# Altium PCB Drude02.PcbDoc (part 3 of 3)
Units mil, origin at the board's own origin, x right, y up, seen from the top; angles counter-clockwise.
Board outline 1961.13 x 2874.02 mil, 4 copper layers (Top Layer, GND, Supply, Bottom Layer), stack 59.85 mil thick; 217 components, 145 nets, 718 pads, 491 vias.
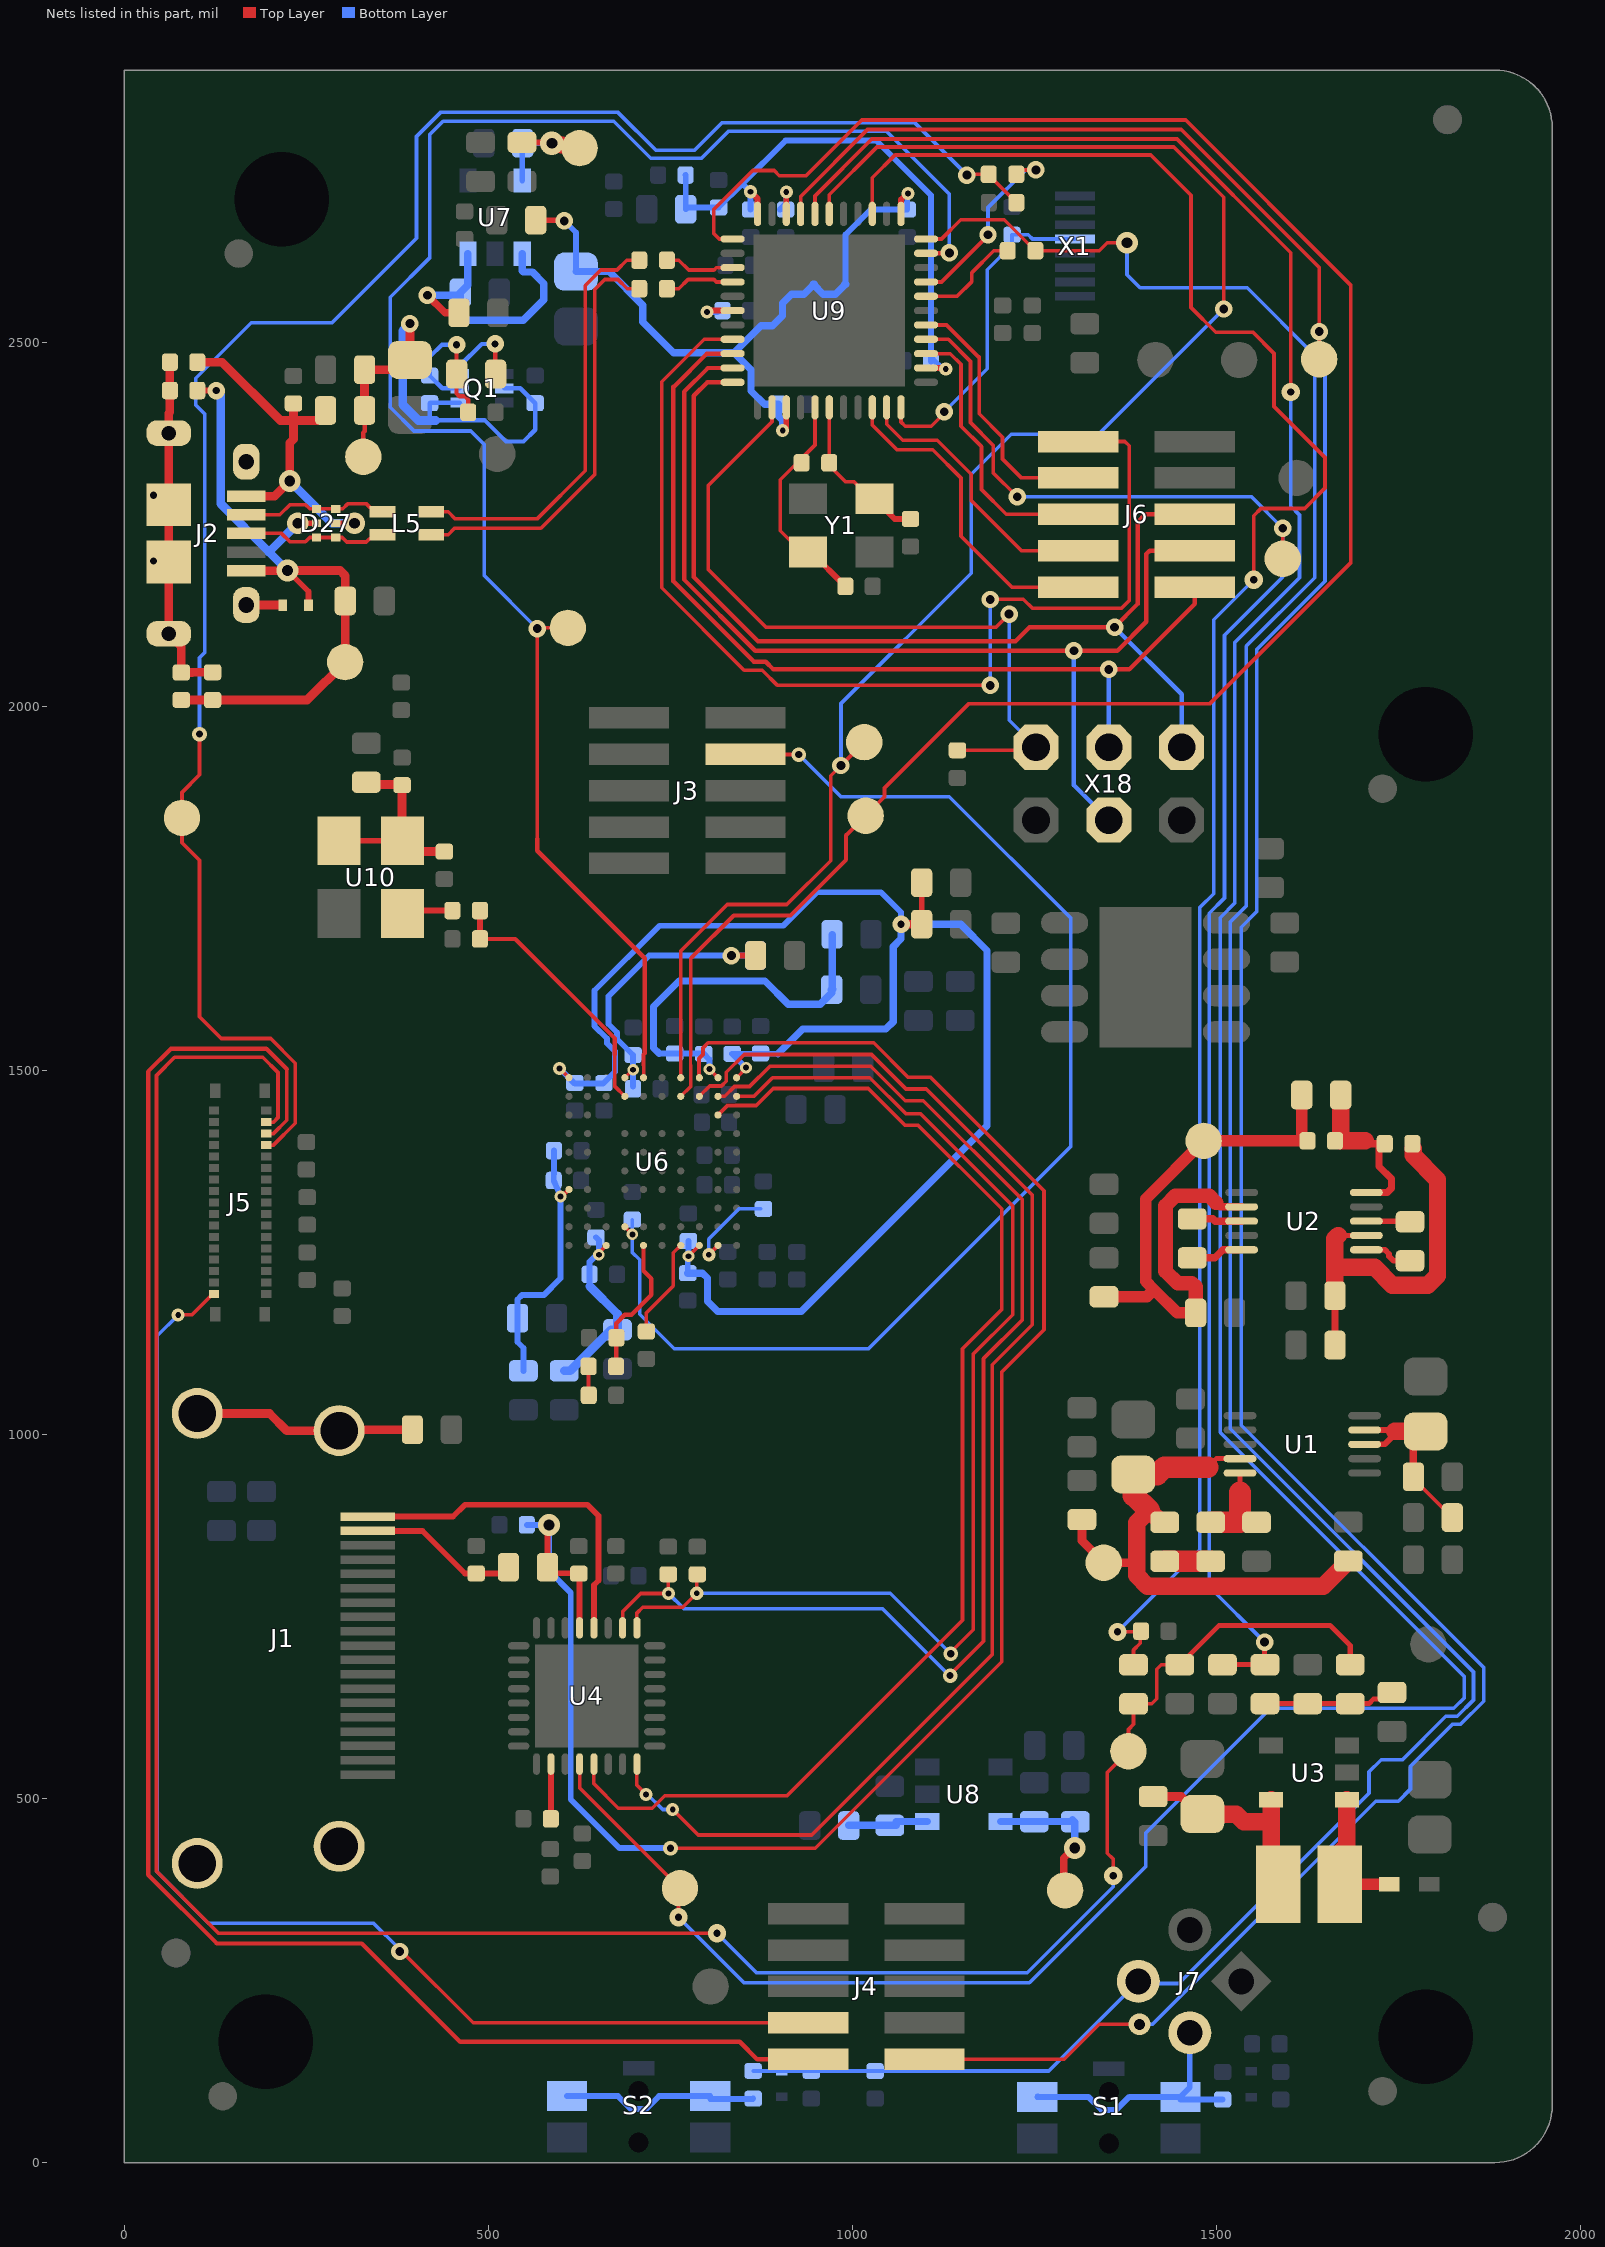
[diagram p5: the nets of this part, all layers, seen from the top]

## Via types
v1: diameter 20, hole 10, Top Layer to Bottom Layer, 120 vias
v2: diameter 16, hole 8, Top Layer to Bottom Layer, tented both sides, 85 vias
v3: diameter 24, hole 12, Top Layer to Bottom Layer, tented both sides, 58 vias
v4: diameter 30, hole 15, Top Layer to Bottom Layer, tented both sides, 34 vias
v5: diameter 19.68, hole 8, Top Layer to Bottom Layer, 34 vias
v6: diameter 18, hole 8, Top Layer to Bottom Layer, tented both sides, 31 vias
v7: diameter 29, hole 15, Top Layer to Bottom Layer, tented both sides, 26 vias
v8: diameter 24, hole 10, Top Layer to Bottom Layer, tented both sides, 20 vias
v9: diameter 30, hole 15, Top Layer to Bottom Layer, 17 vias
v10: diameter 20, hole 10, Top Layer to Bottom Layer, tented both sides, 13 vias
v11: diameter 26, hole 11.81, Top Layer to Bottom Layer, 12 vias
v12: diameter 16, hole 8, Top Layer to Bottom Layer, 9 vias
v13: diameter 25, hole 10, Top Layer to Bottom Layer, 9 vias
v14: diameter 26, hole 12, Top Layer to Bottom Layer, tented both sides, 5 vias
v15: diameter 24, hole 12, Top Layer to Bottom Layer, 5 vias
v16: diameter 20, hole 8, Top Layer to Bottom Layer, tented both sides, 4 vias
v17: diameter 36, hole 20, Top Layer to Bottom Layer, tented both sides, 4 vias
v18: diameter 40, hole 24, Top Layer to Bottom Layer, tented both sides, 2 vias
v19: diameter 27, hole 12, Top Layer to Bottom Layer, tented both sides, 1 vias
v20: diameter 32, hole 15, Top Layer to Bottom Layer, tented both sides, 1 vias
v21: diameter 20, hole 8, Top Layer to Bottom Layer, 1 vias

## Nets (pads, with @x,y where several pads share a name; then routed paths per layer and width w, separated by ;. In a path a pad name is that pad's centre, name@x,y a point inside that pad or via, vN(x,y) a via of type N, cw(c..) or ccw(c..) an arc to the next point about the centre after c; other vN are vias at no path point) (continued)
NetC5_1: C5.1 FL2.2 R7.1 U2.7 | length 536.9
  Top Layer w7: 1667.37,1273.44 U2.7@1705.76,1273.44
  Top Layer w10: FL2.2@1662.65,1123 C5.1@1662.65,1190.76
  Top Layer w24: C5.1@1662.65,1190.76 1662.65,1234.07 ; 1667.37,1273.44 1662.65,1268.72 1662.65,1234.07 ; R7.1@1770.05,1392.65 1770.05,1383.51 1803.48,1350.07 1803.48,1220.19 1802.91,1219.61 1802.91,1218.2 1789.94,1205.23 1741.65,1205.23 1717.05,1229.83 1666.88,1229.83 1662.65,1234.07
NetC6_1: C6.1 U2.3 | length 69.2
  Top Layer w10: C6.1@1466.58,1296.28 1494.93,1296.28 1498.08,1293.13 U2.3@1534.5,1293.13
NetC6_2: C6.2 U2.5 | length 72.5
  Top Layer w10: C6.2@1466.58,1242.73 1497.83,1242.73 1508.86,1253.76 U2.5@1534.5,1253.76
NetC7_1: C7.1 U2.8 | length 60.4
  Top Layer w8: U2.8@1705.76,1293.13 1765.01,1293.13 C7.1@1765.8,1292.34
NetC7_2: C7.2 U2.6 | length 68.1
  Top Layer w8: U2.6@1705.76,1253.76 1731.39,1253.76 1737,1248.15 1737,1244.91 1743.11,1238.8 C7.2@1765.8,1238.8
NetC8_1: C8.1 C12.2 FL5.1 R8.1 TP5.TP U2.2 | length 875.2
  Top Layer w10: 1499.27,1318.47 1504.93,1312.81 U2.2@1534.5,1312.81
  Top Layer w16: FL5.1@1345.47,1189.23 1404.39,1189.23 1414.11,1198.94 ; C8.1@1471.31,1167.14 1445.91,1167.14 1414.11,1198.94 ; C12.2@1616.98,1466.35 1616.98,1426.05 1616.98,1403.37 TP5.TP@1482.33,1403.37 1402.61,1323.64 1402.61,1210.45 1414.11,1198.94
  Top Layer w20: C8.1@1471.31,1167.14 1471.31,1202.8 1466.11,1208 1446.43,1208 1429.9,1224.54 1429.9,1314.47 1443.27,1327.84 1489.9,1327.84 1499.27,1318.47
NetC10_1: C10.1 FL4.1 R1.2 R2.1 TP4.TP U1.9 | length 767.4
  Top Layer w7: 1487.94,955.1 1499.75,966.91 U1.9@1532.23,966.91
  Top Layer w12: FL4.1@1315.11,883.23 1315.11,854 TP4.TP@1345.11,824 1390.2,824
  Top Layer w24: R2.1@1428.89,879.51 1423.77,879.51 1407.23,896.05 1390.2,879.02 1390.2,824 1390.2,806.94 1405.18,791.97 1646.85,791.97 R1.2@1681.11,826.23
  Top Layer w30: 1407.23,896.05 1387.02,916.26 1385.57,916.26 C10.1@1385.57,945.26 1418.57,945.26 1428.42,955.1 1487.94,955.1
NetC11_1: C11.1 FL15.2 L1.1 U3.5 | length 235.1
  Top Layer w12: FL15.2@1413,502.77 1451.54,502.77 1475.54,478.76 C11.1@1480.62,478.76
  Top Layer w24: C11.1@1493,478.6 1527.19,478.6 1537.62,468.17 1574.83,468.17 ; L1.1@1574.83,426.88 1574.83,468.17 ; U3.5@1574.83,498.28 1574.83,468.17
NetC12_1: C12.1 R7.2 R8.2 U2.10 | length 230.1
  Top Layer w10: 1704.45,1403.37 1708.39,1399.43 R7.2@1731.05,1399.43 ; U2.10@1705.76,1332.5 1734.3,1332.5 1740.2,1338.4 1740.2,1351.2 1723.27,1368.13 R7.2@1723.27,1399.42
  Top Layer w24: C12.1@1670.52,1466.35 1670.52,1426.05 1670.52,1403.37 1704.45,1403.37
NetC18_1: C18.1 FL6.2 U7.1 U7.3 | length 404.4
  Top Layer w10: v3(416.11,2565) 440.35,2540.76 FL6.2@459.34,2540.76
  Bottom Layer w10: v3(416.11,2565) 458.02,2565 C18.1@461.34,2568.32 ; U7.3@471.71,2622.12 471.71,2578.69 C18.1@461.34,2568.32 ; U7.1@546.51,2622.12 546.51,2598.24 547.8,2596.95 559.96,2596.95 575.78,2581.14 575.78,2558.77 547.59,2530.58 461.34,2530.58 C18.1@461.34,2568.32
NetC19_1: C19.1 FL7.1 TP6.TP U7.5 | length 171.3
  Top Layer w8: FL7.1@546.11,2774.77 v20@585.94,2774.77
  Top Layer w12: v20@585.94,2774.77 587.18,2774.52 v20(587.02,2773.69)
  Top Layer w24: v20(587.02,2773.69) TP6.TP@625.11,2767
  Bottom Layer w8: U7.5@546.51,2722.51 C19.1@546.51,2773.2 ; C19.1@547.01,2773.69 v20(587.02,2773.69)
NetC20_1: C20.1 FL8.2 U8.1 | length 107.9
  Bottom Layer w10: FL8.2@994.88,463.34 C20.1@1051.32,463.34 C20.1@1059.98,463.34 ; C20.1@1059.98,468.6 U8.1@1102.8,468.6
NetC21_1: C21.1 FL9.1 TP7.TP U8.5 | length 216.4
  Top Layer w10: TP7.TP@1290,381 1290,418.46 1294.77,423.23 1305.23,423.23 1296.23,432.23 v9(1305.23,432.23)
  Bottom Layer w10: U8.5@1203.2,468.6 1299.83,468.6 1302.23,471 1305.23,468 v9(1305.23,432.23)
NetC22_1: C22.1 U4.26 | length 75.2
  Top Layer w8: C22.1@585.62,472.33 585.79,472.5 U4.26@585.79,547.5
NetC23_1: C23.1 C70.2 FL22.1 U4.13 U6.K3 | length 2597.5
  Top Layer w5: v10(750,432) 949,432 1205.11,688.11 1205.11,1086 1263,1143.89 1263,1335 1107.17,1490.83 1076.17,1490.83 1029,1538 801.67,1538 794.67,1531 794.67,1522 789.17,1516.5 789.17,1498 ; U6.K3@789.65,1490.16 789.17,1498 ; 789.17,1498 789.15,1498.35 789.17,1498
  Top Layer w8: v4(583,876) 580.9,873.9 FL22.1@580.9,817.8 589.16,809.54 C70.2@625.13,809.54 ; U4.13@625.16,734.5 C70.2@625.16,809.5
  Bottom Layer w8: C23.1@552.7,876 v4(583,876) 583,813 613.11,782.89 613.11,498.89 680,432 v10(750,432)
NetC24_2: C24.2 FL22.2 J1.18 | length 220.8
  Top Layer w8: J1.18@334.25,867.64 409.47,867.64 467.87,809.24 C24.2@483.13,809.24 518.79,809.24 FL22.2@527.35,817.8
NetC32_1: C32.1 U9.6 | length 49.8
  Top Layer w8: v6(800.11,2541.76) 802.11,2543.76 U9.6@835.24,2543.76
  Bottom Layer w8: v6(800.11,2541.76) 803.41,2541.76 v6@804.41,2540.76 ; v6@805.41,2541.76 C32.1@814.57,2541.76
NetC45_1: C45.1 FL3.1 R4.1 U1.3 U1.4 | length 284.1
  Top Layer w5: FL3.1@1770.34,942 1770.34,939.54 R4.1@1823.88,886
  Top Layer w8: U1.3@1703.49,986.6 1731.17,986.6 1742.78,998.21 1742.78,1006.28 ; U1.4@1703.49,1006.28 1742.78,1006.28 ; 1744.75,1004.31 1742.78,1006.28
  Top Layer w10: FL3.1@1770.34,942 1770.34,987.5 C45.1@1787.15,1004.31
  Top Layer w24: 1744.75,1004.31 C45.1@1787.15,1004.31
NetC46_1: C46.1 C47.2 FL24.1 U10.1 U10.4 | length 271.1
  Top Layer w8: U10.1@294.99,1815.74 380.99,1815.74 U10.4@381.3,1816.05
  Top Layer w12: FL24.1@332.3,1895.97 FL24.1@336.23,1892.04 ; FL24.1@343.6,1892.74 381.3,1892.74 C46.1@381.3,1892.04 ; C46.1@381.6,1891.74 C46.1@381.3,1892.04 ; C47.2@439.3,1800.74 396.61,1800.74 U10.4@381.61,1815.74 381.3,1816.05 C46.1@381.3,1892.04
NetC49_1: C49.1 U6.A4 | length 137.9
  Top Layer w5: C49.1@716.93,1141.7 C49.1@716.93,1141.77 ; C49.1@717,1141.7 C49.1@716.93,1141.77 ; U6.A4@764.06,1259.84 753.78,1249.57 753.78,1231.61 753.96,1231.42 753.96,1204.19 716.93,1167.15 C49.1@716.93,1141.77
NetC50_1: C50.1 R18.2 | length 39.7
  Top Layer w5: R18.2@637.44,1093.6 637.44,1054.29 C50.1@637.73,1054
NetC51_1: C51.1 R18.1 U6.A6 | length 197.2
  Top Layer w5: 712.87,1225 U6.A6@712.87,1259.84
  Top Layer w6: R18.1@676.32,1092.61 675.7,1093.24 C51.1@675.7,1133 675.7,1153 687.29,1164.59 696.37,1164.59 723.78,1192 723.78,1214.09 712.87,1225
NetC55_1: C55.1 U9.42 | length 58.2
  Top Layer w8: U9.42@909.06,2676.63 909.06,2706.7 v6(909.11,2706.76)
  Bottom Layer w8: C55.1@900.11,2682.45 909.11,2691.45 v6(909.11,2706.76)
NetC56_1: C56.1 C59.1 C60.1 C83.1 FL19.1 U9.24 U9.44 | length 812.6
  Top Layer w8: v6(860,2707) 869.68,2697.32 U9.44@869.68,2676.63 ; U9.24@1100.98,2465.02 1127.85,2465.02 1128.11,2464.76 v6(1128.11,2463.76)
  Bottom Layer w8: C83.1@770.81,2730 770.88,2729.93 FL19.1@770.88,2683 773.2,2685.32 C60.1@816,2685.32 848.7,2718.02 ; C59.1@860.11,2682.46 860.11,2706.89 v6(860,2707) 848.98,2718.02 848.7,2718.02 ; v6(1128.11,2463.76) 1123.48,2463.76 1110.64,2476.59 1107.81,2473.76 C56.1@1107.81,2474.76 1107.81,2702.3 1032.61,2777.5 908.18,2777.5 848.7,2718.02
NetC57_1: C57.1 R72.1 U9.17 Y1.1 | length 222.9
  Top Layer w5: R72.1@965.32,2333.88 990.47,2308.74 1002.01,2308.74 Y1.1@1025.14,2285.62 ; R72.1@968.11,2334.88 U9.17@968.11,2410.88
  Top Layer w8: R72.1@965.32,2333.88 R72.1@965.32,2334.88 ; Y1.1@1025.14,2285.62 Y1.1@1030.14,2285.62 1058.08,2257.68 C57.1@1079.65,2257.68
NetC58_1: C58.1 R72.2 U9.16 Y1.3 | length 310.1
  Top Layer w5: Y1.3@943.04,2212.2 Y1.3@938.86,2212.2 929.91,2212.2 900.86,2241.25 900.86,2311.59 948.43,2359.15 U9.16@948.43,2410.88
  Top Layer w8: Y1.3@943.04,2212.2 C58.1@990.08,2165.16
NetC72_1: C72.1 R10.2 R32.2 R34.2 | length 180.7
  Top Layer w7: R34.2@1566.62,630.39 C72.1@1625.12,630.39 R32.2@1683.62,630.39 1709.39,630.39 1716,637 1732.22,637 R10.2@1741,645.77
NetC77_1: C77.1 R30.1 U9.36 | length 2836.1
  Top Layer w5: U9.36@1027.17,2676.63 1027.17,2726.17 1058.51,2757.51 1409.6,2757.51 1465,2702.11 1465,2548 1499,2514 1550,2514 1579,2485 1579,2412 1649,2342 1649,2300 1621,2272 1561,2272 1551,2262 v13(1551,2174) ; v13(1364,729) 1395.3,729 1395.3,713.28 1386,703.99 R30.1@1386,683.77
  Bottom Layer w5: v13(1364,729) 1477,842 1477,1724 1496,1743 1496,2119 v13(1551,2174)
NetC81_2: C81.2 Q1.5 R6.1 R35.2 | length 222.6
  Top Layer w6: v8(456.11,2497) 456.11,2430 460,2426.11 468,2426.11 472.11,2422 C81.2@472.11,2404
  Bottom Layer w6: v8(456.11,2497) 436.11,2497 419.11,2480 R6.1@419.11,2454.54 436.65,2437 Q1.5@460.6,2437
NetC91_1: C91.1 C93.2 D27.5 FL20.2 J2.1 | length 538.2
  Top Layer w8.1: D27.5@290.27,2251.76 313,2251.76 313,2250.76 v7@316,2250.76
  Top Layer w12: C93.2@100.11,2473 134.11,2473 214.11,2393 232.11,2393 ; J2.1@167.3,2288.94 206.18,2288.94 v4(227,2309.76) 227,2361.89 232.11,2367 232.11,2393 ; C91.1@232.11,2416.3 232.11,2393 ; FL20.2@276.34,2406.65 276.34,2395.62 273.72,2393 232.11,2393
  Bottom Layer w12: v4(227,2309.76) 285,2251.76 v7(316,2251.76)
NetD1_A: D1.A L1.2 U3.1 | length 188.1
  Top Layer w16: L1.2@1669.32,382.14 D1.A@1737.24,382.14
  Top Layer w24: L1.2@1669.32,382.14 1669.32,425.4 1679.17,435.24 U3.1@1679.17,498.28
NetFL23_2: FL23.2 J1.20 J1.21 J1.22 J1.23 | length 305.8
  Top Layer w12: J1.22@100,1029.06 199.17,1029.06 222.8,1005.43 J1.20@294.88,1005.43 296.23,1006.78 FL23.2@395.46,1006.78
NetJ1_19: J1.19 U4.12 | length 486.5
  Top Layer w8: J1.19@334.25,887.32 451.43,887.32 467.82,903.71 635.9,903.71 651.13,888.48 651.13,799.56 644.84,793.27 U4.12@644.84,734.5
NetJ4_7: J4.7 J5.1 | length 1819.5
  Top Layer w5: v6(73.82,1164.37) 92.52,1164.37 121.06,1192.91 J5.1@122.75,1192.91 ; v3(378,290) 381,290 479,192 J4.7@939.19,192
  Bottom Layer w5: v6(73.82,1164.37) 45.11,1135.66 45.11,399.15 115.26,329 342,329 378,293 v3(378,290)
NetJ4_9: J4.9 J5.30 | length 2436
  Top Layer w5: J5.30@194.8,1413.39 204.69,1413.39 222.94,1431.65 222.94,1431.84 223.12,1432.01 223.12,1501.88
  Top Layer w6: 223.12,1501.88 195,1530 63.97,1530 32.5,1498.53 32.5,395.5 127,301 326,301 461,166 845,166 869,142 J4.9@939.19,142
NetJ4_10: J4.10 TP11.TP U9.41 | length 4039
  Top Layer w5: U9.41@928.74,2676.63 928.74,2700.63 1020.62,2792.51 1451.6,2792.51 1641.11,2603 v3(1641.11,2515) 1641.11,2477.11 TP11.TP@1641,2477 ; J4.10@1099.03,142 1291,142 1339,190 v9(1394,190)
  Bottom Layer w5: v9(1394,190) 1412,190 1718.5,496.5 1749.81,496.5 1766.5,513.2 1766.5,544.5 1824,602 1835.11,602 1867,633.89 1867,680 1534,1013 1534,1697 1555,1718 1555,2078 1649,2172 1649,2489 1641.11,2496.89 v3(1641.11,2515)
NetJ5_28: J5.28 R21.2 R26.2 TP19.TP | length 2642.1
  Top Layer w5: v1(103.11,1962.11) 103.11,1906.11 79,1882 TP19.TP@79,1847 79,1813 103.11,1788.89 103.11,1573.89 133,1544 200.81,1544 234.62,1510.19 234.62,1427.57 204.69,1397.64 J5.28@194.8,1397.64 ; v3(1157.11,2730) 1162.11,2730 1163.11,2731 R26.2@1187.11,2731 1187.11,2730 R21.2@1225.11,2692
  Bottom Layer w5: v1(103.11,1962.11) 103.11,2067.02 110.11,2074.02 110.11,2402 98.11,2414 98.11,2451 174.11,2527 285.11,2527 401.11,2643 401.11,2783 434.11,2816 678,2816 729.98,2764.02 783,2764.02 820.98,2802 1085.11,2802 v3(1157.11,2730)
NetJ5_32: J5.32 R13.1 R30.2 R32.1 TP16.TP | length 3453.5
  Top Layer w5: J5.32@194.8,1429.13 204.69,1429.13 211,1435.45 211,1497.27 190.08,1518.19 68.89,1518.19 44,1493.3 44,400.26 129.26,315 v13(814,315) ; v13(1358,394) 1358,417 1350,425 1350,536 TP16.TP@1379,565 1379,595 1386,602 R30.2@1386,630.23 1411,630.23 1417.77,637 1417.77,677.71 1424,683.94 R13.1@1449.62,683.94
  Top Layer w7: R13.1@1449.62,683.94 1503.69,738 1655.79,738 1683.62,710.16 R32.1@1683.62,683.94
  Bottom Layer w5: v13(814,315) 868,261 1240,261 1358,379 v13(1358,394)
NetJ7_2: J7.2 R24.2 S1.1 S1.2 | length 363.6
  Bottom Layer w8: S1.2@1254.44,91.13 S1.2@1253.68,90.37 1323.96,90.37 1341.85,72.48 1362.37,72.48 1380.26,90.37 S1.1@1450.54,90.37 1463.29,103.12 J7.2@1463.29,178.29 ; S1.1@1450.7,86.6 R24.2@1508.31,86.6
NetQ1_6: Q1.6 R35.1 | length 112.8
  Top Layer w6: R35.1@509.11,2457.45 v8(509.11,2498)
  Bottom Layer w6: Q1.6@460.6,2456.68 460.6,2467.99 490.61,2498 v8(509.11,2498)
NetR2_2: R2.2 R3.2 | length 63
  Top Layer w30: R2.2@1428.89,825.97 R3.2@1491.88,825.97
NetR3_1: R3.1 R15.1 U1.10 | length 108
  Top Layer w7: 1532.23,920.65 U1.10@1532.23,947.23
  Top Layer w30: R3.1@1491.88,879.51 1532.18,879.51 1532.18,920.61 1532.23,920.65
NetR5_2: R5.2 U6.A2 | length 127.7
  Top Layer w5: v6(802.67,1247) 802.67,1247.28 U6.A2@815.24,1259.84
  Bottom Layer w5: v6(802.67,1247) 802.67,1268.51 844.16,1310 R5.2@873.67,1310
NetR9_1: R9.1 U10.3 | length 70.5
  Top Layer w8: U10.3@381.61,1715.74 385.61,1719.74 R9.1@450.4,1719.74
NetR9_2: R9.2 R17.2 U6.J7 | length 366.1
  Top Layer w5: 673.67,1522 673.67,1478.18 U6.J7@687.28,1464.57
  Top Layer w6: R17.2@488.3,1680.74 536.93,1680.74 673.67,1544 673.67,1522
  Top Layer w8: R17.2@488.3,1680.74 R9.2@488.3,1719.74
NetR14_1: R14.1 U4.9 U6.J1 | length 1636.6
  Top Layer w5: U4.9@703.9,734.5 703.9,754.98 711.92,763 767,763 v6(786,782) 786,807.12 R14.1@786.98,808.1 ; U6.J1@840.83,1464.57 864.67,1464.57 890.26,1490.16 1023.84,1490.16 1073.33,1440.67 1093.33,1440.67 1220,1314 1220,1164.63 1166,1110.63 1166,732 1135,701 v1(1135,699)
  Bottom Layer w5: v6(786,782) 1052,782 v1(1135,699)
NetR16_1: R16.1 U4.10 U6.J2 | length 1761.3
  Top Layer w5: U4.10@684.21,734.5 684.35,734.64 684.35,757 709.07,781.72 v6(747.35,781.72) 747,782.08 R16.1@747,808.1 ; U6.J2@815.24,1464.57 824.57,1464.57 838,1478 858.67,1478 886.57,1505.91 1025.09,1505.91 1072.33,1458.67 1097.33,1458.67 1233,1323 1233,1157.36 1180,1104.36 1180,716.16 1134,670.16 v1(1134,669)
  Bottom Layer w5: v6(747.35,781.72) 768.08,761 1041,761 1133,669 v1(1134,669)
NetR25_2: R25.2 S2.1 S2.2 | length 271
  Bottom Layer w8: S2.2@607.69,91.37 677.96,91.37 695.85,73.48 716.37,73.48 734.26,91.37 S2.1@804.54,91.37 ; S2.1@804.54,87.43 863.05,87.43 R25.2@863.63,88.02
NetR26_1: R26.1 U9.30 | length 263.1
  Top Layer w5: U9.30@1100.98,2583.13 1122.23,2583.13 1186.11,2647.01 v3(1186.11,2648) ; R26.1@1226.11,2737 v3(1252,2737)
  Bottom Layer w5: v3(1186.11,2648) 1186.11,2685.34 1237.77,2737 v3(1252,2737)
NetR29_1: R29.1 R34.1 TP10.TP U9.26 | length 2404.4
  Top Layer w5: U9.26@1100.98,2504.39 1131.72,2504.39 1162.11,2474 1162.11,2390 1193.11,2359 1193.11,2321 v3(1226.11,2288) ; TP10.TP@1591,2203 v3(1591,2245)
  Top Layer w7: R29.1@1508.12,683.94 R34.1@1566.62,683.94 1565.62,684.94 1566,685.32 v3(1566,715)
  Bottom Layer w5: v3(1226.11,2288) 1548,2288 v3(1591,2245) 1591,2178 1511,2098 1511,1737 1490,1716 1490,791 v3(1566,715)
NetR33_1: R33.1 U9.29 | length 145.3
  Top Layer w5: U9.29@1100.98,2563.44 1143.55,2563.44 1164,2583.89 1164,2595.98 1194.12,2626.1 1213.11,2626.1 R33.1@1213.21,2626
NetTP12_TP: TP12.TP U4.28 U9.40 | length 4523
  Top Layer w5: U4.28@625.16,547.5 625.16,514.84 TP12.TP@763,377 761,375 v13(761,337) ; U9.40@948.43,2676.63 948.43,2701.32 1026.62,2779.51 1445.6,2779.51 1602,2623.11 v13(1602,2432)
  Bottom Layer w5: v13(761,337) 851,247 1243,247 1403,407 1403,453 1574,624 1826,624 1840,638 1840,668 1505,1003 1505,1710 1525,1730 1525,2088 1614,2177 1614,2263 1602,2275 v13(1602,2432)
NetTP13_TP: TP13.TP U6.K4 U9.39 | length 2305.9
  Top Layer w5: U6.K4@764.06,1490.16 764.06,1664.28 827.78,1728 909.78,1728 970.11,1788.33 970.11,1905 v3(984.11,1919) TP13.TP@1016.11,1951 ; U9.39@968.11,2676.63 968.11,2703 1033.62,2768.51 1441.05,2768.51 1510,2699.55 v3(1510,2546)
  Bottom Layer w5: v3(984.11,1919) 984.11,2004.13 1163.11,2183.13 1163.11,2319 1218.11,2374 1338,2374 v3(1510,2546)
NetTP14_TP: TP14.TP U6.J4 U9.1 | length 2822.5
  Top Layer w4: 777.67,1507 777.67,1522
  Top Layer w5: U6.J4@764.06,1464.57 777.67,1478.18 777.67,1507 ; 777.67,1522 777.67,1653.89 779.67,1655.89 ; U9.1@835.24,2642.18 816.92,2642.18 809.2,2649.9 809.2,2682.2 863.18,2736.18 892.34,2736.18 899.52,2729 936.11,2729 1012.62,2805.51 1457.6,2805.51 1684.11,2579 1684.11,2197 1491.11,2004 1160,2004 1044,1888 1044,1875.89 TP14.TP@1018.11,1850
  Top Layer w6: 779.67,1655.89 836.78,1713 914.78,1713 991.11,1789.33 991.11,1823 TP14.TP@1018.11,1850
NetTP15_TP: TP15.TP U6.K6 U9.32 | length 2469.1
  Top Layer w5: 567.11,1818 v3(567.11,2107) 568.11,2108 TP15.TP@609.11,2108 ; 712.87,1522 712.87,1507.3 713.17,1507.01 713.17,1498 ; 713.18,1498.4 713.17,1498 ; 713.17,1498 U6.K6@712.87,1490.16 713.17,1490.45 713.17,1498
  Top Layer w6: 567.11,1818 567.11,1801.91 714.67,1654.35 714.67,1523.8 712.87,1522 ; U9.32@1100.98,2622.5 v3@1133.11,2622.5 ; v3(1133.11,2623) v3@1136.11,2623
  Bottom Layer w5: v3(567.11,2107) 494.11,2180 494.11,2360 475.61,2378.5 397.75,2378.5 365.25,2411 365.25,2562.14 419.11,2616 419.11,2785.44 437.67,2804 672,2804 722.98,2753.02 792.56,2753.02 829.54,2790 1046.55,2790 1133.11,2703.44 v3(1133.11,2623)
NetU4_29: U4.29 U6.H2 | length 1714.9
  Top Layer w5: U4.29@644.84,547.5 644.84,520.39 678.44,486.8 725.09,486.8 742.29,504 910,504 1151,745 1151,1117.89 1205,1171.89 1205,1310 1090.33,1424.67 1072.33,1424.67 1021.61,1475.39 891.06,1475.39 867.67,1452 828.26,1452 U6.H2@815.24,1438.98
NetU4_32: U4.32 U6.J3 | length 1871
  Top Layer w5: U4.32@703.9,547.5 703.9,518.43 v6(716.53,505.8) ; v6(753,485) 788,450 944,450 1192,698 1192,1095.89 1247,1150.89 1247,1329 1101.33,1474.67 1073.33,1474.67 1026,1522 851.18,1522 826.66,1497.48 826.66,1485.43 819.97,1478.74 803.82,1478.74 U6.J3@789.65,1464.57
  Bottom Layer w5: v6(716.53,505.8) 717.51,506.78 739.29,485 v6(753,485)
PB0: J6.10 U9.8 | length 1514.5
  Top Layer w5: U9.8@835.24,2504.39 796.5,2504.39 738.11,2446 738.11,2163 851.11,2050 876.11,2050 897.11,2029 v3(1189.11,2029) ; v3(1189.11,2147) 1189.61,2147.5 1234.61,2147.5 1247.11,2135 1369.61,2135 1380.11,2145.5 1380.11,2358 1374.11,2364 J6.10@1310.19,2364
  Bottom Layer w5: v3(1189.11,2029) v3(1189.11,2147)
PB1: J6.1 U9.9 X18.3 | length 1300.8
  Top Layer w6: U9.9@835.24,2484.7 800.06,2484.7 754.35,2439 753.83,2439 753.83,2172.27 864.6,2061.5 880.87,2061.5 891.37,2051 v3(1352.11,2051) 1380.11,2051 1470.03,2140.92 J6.1@1470.03,2164
  Bottom Layer w6: X18.3@1352.11,1944 v3(1352.11,2051)
PB2: J6.3 U9.10 X18.4 | length 1443.8
  Top Layer w6: U9.10@835.24,2465.02 801.37,2465.02 768.68,2432.32 768.68,2174.39 866.31,2076.76 v3(1304.11,2076.76) 1363.87,2076.76 1403.61,2116.5 1403.61,2209.5 1408.11,2214 J6.3@1470.03,2214
  Bottom Layer w6: v3(1304.11,2076.76) 1304.11,1892 X18.4@1352.11,1844
PB3: J6.5 U9.11 X18.1 | length 1375.5
  Top Layer w6: U9.11@835.24,2445.33 800.69,2445.33 782.11,2426.76 782.11,2177.93 870.28,2089.76 1223.87,2089.76 1243.11,2109 v3(1359.87,2109) 1391.61,2140.74 1391.61,2253.5 1402.11,2264 J6.5@1470.03,2264
  Bottom Layer w6: v3(1359.87,2109) 1452.11,2016.76 X18.1@1452.11,1944
PCKIN: C52.1 J3.4 U6.B7 | length 1732.7
  Top Layer w5: U6.B7@687.28,1285.43 v2(697.67,1275) ; v2(697.67,1275) v2@699.32,1273.35 ; J3.4@853.53,1935.04 J3.4@852.92,1934.43 853.35,1934 v10(926.11,1934)
  Bottom Layer w5: C52.1@697.67,1295.3 v2(697.67,1275) 697.67,1250.17 707.67,1240.17 707.67,1165.33 755,1118 1022.11,1118 1300,1395.89 1300,1709 1133,1876 984.11,1876 v10(926.11,1934)
PD2: J6.2 U9.20 | length 446.3
  Top Layer w5: U9.20@1027.17,2410.88 1027.17,2386.7 1061.11,2352.76 1110.35,2352.76 1149.11,2314 1149.11,2234 1219.11,2164 J6.2@1310.19,2164
PD3: J6.4 U9.21 | length 379.5
  Top Layer w5: U9.21@1046.85,2410.88 1046.85,2387.76 1068.85,2365.76 1116.35,2365.76 1163.11,2319 1163.11,2283 1232.11,2214 J6.4@1310.19,2214
PD4: J6.6 U9.25 | length 385
  Top Layer w5: U9.25@1100.98,2484.7 1134.41,2484.7 1149.11,2470 1149.11,2385 1177.11,2357 1177.11,2298 1211.11,2264 J6.6@1310.19,2264
PD7: J6.8 U9.27 | length 359.5
  Top Layer w5: U9.27@1100.98,2524.07 1129.04,2524.07 1173.11,2480 1174.11,2480 1174.11,2402 1206.11,2370 1206.11,2340 1232.11,2314 J6.8@1310.19,2314
PWR_BTN: C17.1 D2.A J7.4 R20.1 R25.1 R33.2 U9.33 | length 3909.5
  Top Layer w5: U9.33@1102.3,2643.5 U9.33@1100.98,2642.18 1122.18,2642.18 1148.5,2668.5 1208.61,2668.5 R33.2@1251.11,2626 1339,2626 1350,2637 v9(1377,2637)
  Bottom Layer w5: R25.1@863.63,125.91 R20.1@943.35,125.91 1269.49,125.91 1389.58,246 1448,246 1709.5,507.5 1709.5,536.81 1726.2,553.5 1755.5,553.5 1815,613 1830.56,613 1853,635.44 1853,674 1519,1008 1519,1704 1541,1726 1541,2083 1635,2177 1635,2482 1542,2575 1395,2575 1377,2593 v9(1377,2637)
RESET: R31.2 U9.13 X18.5 | length 1020.2
  Top Layer w5: U9.13@889.37,2410.88 889.37,2391.2 802.11,2303.95 802.11,2188 881.11,2109 1197.11,2109 v3(1215.11,2127) ; R31.2@1144.11,1939.9 1248.01,1939.9 X18.5@1252.11,1944
  Bottom Layer w5: v3(1215.11,2127) 1215.11,1981 X18.5@1252.11,1944
RESET_TOUCH: R23.1 U9.22 X1.4 | length 464.6
  Top Layer w5: U9.22@1066.54,2410.88 1066.54,2390.76 1072.29,2385 1108.11,2385 1128.11,2405 v3(1126.11,2405)
  Bottom Layer w5: v3(1126.11,2405) 1185.11,2464 1185.11,2600 1219.11,2634 R23.1@1219.11,2648 1241.24,2648 1247.11,2642.13 X1.4@1305.43,2642.13
UC_N: D27.1 D27.6 J2.2 L5.3 | length 202.7
  Top Layer w5: J2.2@167.3,2263.35 213.46,2263.35 227.42,2277.31 248.58,2277.31 254.45,2271.44 D27.1@263.71,2271.44 D27.6@290.27,2271.44 299.69,2271.44 306.5,2278.26 332.48,2278.26 343.24,2267.5 L5.3@354.54,2267.5
UC_P: D27.3 D27.4 J2.3 L5.2 | length 201.1
  Top Layer w5: J2.3@167.3,2237.76 215.87,2237.76 227.42,2226.21 248.58,2226.21 254.45,2232.07 D27.3@263.71,2232.07 D27.4@290.27,2232.07 299.19,2232.07 305.26,2226 332.24,2226 342.25,2236.01 L5.2@354.54,2236.01
UD_N: L5.4 R43.2 | length 585.8
  Top Layer w5: L5.4@421.46,2267.5 444.68,2267.5 454.52,2257.66 566.64,2257.66 633,2324.02 633,2578.15 654.31,2599.47 676.58,2599.47 690.11,2613 R43.2@707.11,2613
UD_P: L5.1 R46.2 | length 584.9
  Top Layer w5: L5.1@421.46,2236.01 444.68,2236.01 453.33,2244.66 572.03,2244.66 646,2318.63 646,2572.77 659.7,2586.47 677.95,2586.47 690.61,2573.81 R46.2@707.11,2573.81
UGND: C48.2 C94.2 D3.C D27.2 FL21.2 J2.5 R44.1 TP3.TP | length 951.2
  Top Layer w8: C94.2@100.11,2434 v8(126.11,2434) ; v4(224,2186.76) 252.83,2157.93 D3.C@252.83,2139 ; v7(238,2251.76) D27.2@263.71,2251.76
  Top Layer w12: C48.2@78.11,2009 106.01,2009 106.11,2009.1 R44.1@121.11,2009.1 251.21,2009.1 TP3.TP@303.11,2061 303.34,2061.23 FL21.2@303.34,2145 303.34,2179.77 296.35,2186.76 v4(224,2186.76) ; J2.5@167.3,2186.58 v4@215.82,2186.58
  Bottom Layer w12: v8(126.11,2434) 132.11,2428 132.11,2278.65 198.5,2212.26 ; v4(224,2186.76) 198.5,2212.26 ; v7(238,2251.76) 198.5,2212.26
UR_N: R43.1 U9.3 | length 97.2
  Top Layer w5: R43.1@745.01,2613 761.51,2613 775.04,2599.47 809.66,2599.47 813,2602.81 U9.3@835.24,2602.81
UR_P: R46.1 U9.4 | length 96.9
  Top Layer w5: R46.1@745.01,2573.81 761.51,2573.81 774.17,2586.47 809.66,2586.47 813,2583.13 U9.4@835.24,2583.13
USBSHIELD: C48.1 C93.1 C94.1 D3.A J2.6 J2.7 J2.8 J2.9 J2.10 J2.11 R44.2 | length 527.3
  Top Layer w12: C93.1@62.41,2473 C94.1@62.41,2434 62.41,2404.17 61,2402.76 J2.6@61,2375.55 J2.10@61,2277.13 J2.11@61,2198.39 J2.7@61,2099.96 78.11,2082.85 C48.1@78.11,2046.7 93.11,2046.7 93.41,2047 R44.2@121.11,2047 ; J2.9@167.3,2139.33 217.06,2139.33 D3.A@217.39,2139
  other v1: 40,2200 40,2290
VDDC1: C15.1 C16.2 C25.1 C26.2 C27.2 C80.1 C84.1 FL10.2 U6.A3 U6.K1 U6.K10 | length 2244.6
  Top Layer w5: v6(597.67,1503) U6.K10@610.51,1490.16 ; v2(774.67,1245) 774.8,1245 U6.A3@789.65,1259.84 ; U6.K1@840.83,1490.16 853.69,1503.02 v2(853.69,1504)
  Top Layer w8: FL10.2@1094.01,1702 1095.01,1703 C84.1@1095.01,1758
  Top Layer w10: FL10.2@1095.01,1701 FL10.2@1095.01,1703
  Top Layer w12: v8(1066.67,1701) 1093.01,1701 FL10.2@1094.01,1702
  Bottom Layer w8: v6(597.67,1503) 618.67,1482 657.37,1482 673.78,1498.41 673.78,1526.39 662.67,1537.5 662.67,1544.11 645.78,1561 645.78,1610 734.78,1699 904.78,1699 950.78,1745 1039,1745 1066.67,1717.33 v8(1066.67,1701) ; C80.1@773.78,1221.7 773.78,1244.11 v2(774.67,1245) C26.2@774.67,1266 ; v2(853.69,1504) C16.2@834.67,1523 897.78,1523
  Bottom Layer w10: C80.1@773.78,1221.7 794.08,1221.7 800.78,1215 800.78,1183 814.78,1169 929.78,1169 1184.78,1424 1184.78,1665 1148.78,1701 v8(1066.67,1701) 1066.67,1680.89 1055.78,1670 1055.78,1567 1045.78,1557 931.78,1557 897.78,1523
VDDIO1: C39.1 C40.2 C89.1 FL16.2 U6.K2 | length 529.6
  Top Layer w5: v2(803.67,1502) 803.67,1501.72 U6.K2@815.24,1490.16
  Bottom Layer w8: 734.48,1523.3 C39.1@755.67,1523.3 795.37,1523.3 C40.2@795.67,1523 803.67,1515 v2(803.67,1502)
  Bottom Layer w10: 734.48,1523.3 726.78,1531 726.78,1588 761.78,1623 879.78,1623 911.78,1591 955.71,1591 971.44,1606.73 C89.1@971.44,1611 ; C89.1@972.01,1611.57 FL16.2@972.01,1687
  Bottom Layer w12: C89.1@971.44,1611 C89.1@972.01,1611.57
VDDIO2: C41.1 C42.2 C90.1 FL17.2 U6.K7 | length 413.8
  Top Layer w5: U6.K7@687.28,1490.16 698.13,1501 v2(698.67,1501)
  Top Layer w8: v3(833.78,1658) FL17.2@866.9,1658
  Bottom Layer w8: C42.2@698.67,1478 v2(698.67,1501) ; v2@699.67,1502 v2(698.67,1501) ; C90.1@866.9,1658 v3(833.78,1658) 720.78,1658 664.78,1602 664.78,1564 676.67,1552.11 676.67,1543.3 C41.1@698.67,1521.3 v2(698.67,1501)
VDDMIPI: C28.1 C29.2 C85.1 FL11.2 U6.D10 | length 366.7
  Top Layer w5: v2(599,1327) 599,1326.9 599.9,1326 U6.D10@610.51,1336.61
  Bottom Layer w8: FL11.2@548,1087.54 548,1119 539.91,1127.09 C85.1@539.91,1159.82 539.91,1185.58 545.85,1191.52 575.85,1191.52 599,1214.67 v2(599,1327) 599,1331.13 596.24,1333.89 C29.2@589.67,1349 589.78,1364.36 589.86,1374.64 C28.1@589.97,1390
VDDPLL: C37.1 C38.2 C88.1 FL14.2 U6.A8 | length 269.4
  Top Layer w5: v2(651.67,1247) 648.85,1247 U6.A8@661.69,1259.84
  Bottom Layer w8: FL14.2@603.97,1087.54 FL14.2@604.2,1087.77 ; 638.97,1203.7 C37.1@638.97,1220 638.97,1237.3 648.67,1247 v2(651.67,1247) 651.67,1267 C38.2@647.67,1271
  Bottom Layer w12: FL14.2@603.97,1087.54 612.15,1087.54 668.5,1143.9 C88.1@677.17,1143.9 677.17,1165.5 638.97,1203.7
VMCU: C53.1 C54.1 C82.1 FL18.1 U9.14 U9.34 | length 1014.9
  Top Layer w8: FL18.1@564.88,2668 603.11,2668 v3(604.11,2667) ; v6(904.11,2379) 908.87,2379 909.06,2378.81 U9.14@909.06,2410.88 ; U9.34@1066.54,2676.63 1066.54,2696.36 1074.93,2704.76 v6(1076.11,2704.76)
  Bottom Layer w8: v3(604.11,2667) 620.11,2651 C82.1@620.11,2597.4 ; 990.57,2580.05 990.57,2648.46 1024.57,2682.46 C53.1@1075.11,2682.46 1075.11,2703.76 v6(1076.11,2704.76)
  Bottom Layer w10: C82.1@620.11,2597.4 665.71,2597.4 712,2551.11 712,2528 754,2486 837.33,2486 ; v6(904.11,2379) 904.11,2393 898.41,2398.7 C54.1@898.41,2415 879.11,2415 860.65,2433.46 860.65,2462.68 837.33,2486 ; 990.57,2580.05 988.95,2580.05 988.95,2578.43 976.74,2566.22 959.48,2566.22 947.27,2578.43 947.27,2580.05 945.65,2580.05 945.65,2578.43 933.44,2566.22 916.33,2566.22 903.96,2553.85 903.96,2536.75 890.13,2522.91 874.25,2522.91 837.33,2486
VUSB: C62.1 C63.1 FL20.1 Q1.2 Q1.4 R6.2 R36.2 TP2.TP | length 718.7
  Top Layer w6: TP2.TP@329.88,2344.77 TP2.TP@328.11,2343 328.11,2376.23 329.88,2378 FL20.1@329.88,2406.65
  Top Layer w12: FL20.1@329.88,2406.65 C62.1@329.88,2462.65 378.71,2462.65 C63.1@392.11,2476.05 v3(392.11,2526)
  Bottom Layer w6: 419.11,2393 R6.2@419.11,2416.65 419.78,2417.31 Q1.4@460.6,2417.31 ; 427.11,2393 495.11,2393 524.11,2364 548.11,2364 564.11,2380 R36.2@564.11,2416.65 543.76,2437 Q1.2@521.62,2437
  Bottom Layer w12: v3(392.11,2526) 382.11,2516 382.11,2414.65 403.76,2393 419.11,2393 427.11,2393
pads on no net: FID1.1 FID2.1 FID3.1 FID4.1 FID5.1 FID6.1 H1. H2. H3. H4. J1.14 J2.4 J5.6 J5.P1 J5.P2 J5.P3 S1.6 S1.7 S2.6 S2.7 U4.16 U4.30 U4.31 U6.G5 U7.4 U8.4 U9.31 U9.37 U9.38

## Polygon pours and split planes (outlines as drawn)
GND on Top Layer "Direct-Connect" (solid, pour order 80): 474.31,837.89 482.97,837.89 495.13,850.04 495.13,878.89 488,886.02 470,886.02 454,870.02 454,855.36 471.13,838.23
GND on Top Layer "Direct-Connect" (solid, pour order 76): 666.18,837.65 691.37,837.65 699,830.02 701,828.02 710,828.02 725,843.02 725,851.02 691,885.02 681,885.02 674,878.02 666,870.02 666,864.02
5V on Top Layer "Direct-Connect" (solid, pour order 70): 674,762.02 707,795.02 707,816 702.98,820.02 677,820.02 663,806.02 663,794.02 663,789 660,786 657,783 657,762.02
3.3V on Top Layer "Direct-Connect" (solid, pour order 68): 576.18,421.65 598.63,421.65 616,439.02 631.98,454.99 641,454.99 641,475.02 622,494.02 609.49,506.53 605.47,506.53 602.49,506.53 602,507.02 602,494.26 604.91,491.35 604.91,453.93 592,441.02
NetC23_1 on Top Layer "Direct-Connect" (solid, pour order 66): 628,805.18 615.18,818 598,835.18 598,858.02 598,877.02 592,883.02 573,883.02 568,878.02 568,815.02 628,755.02
GND on Top Layer "Direct-Connect" (solid, pour order 50): 247.05,1204.72 250.98,1204.72 275.59,1180.12 287,1168.71 287,1160 296,1160 308,1172 258.65,1221.35 242,1221.35
AVDD12 on Top Layer "Direct-Connect" (solid, pour order 12): 853.35,1210.21 853.35,1225.39 853.35,1235.24 862.2,1244.09 862.2,1249.02 857.28,1253.94 850.39,1253.94 841.54,1245.08 829.72,1245.08 825.79,1241.14 825.79,1211.61 827.19,1210.21
VDDC1 on Top Layer "Direct-Connect" (solid, pour order 10): 769.69,1251.97 769.69,1181.1 771.65,1179.13 779.53,1179.13 790.35,1168.31 810.04,1168.31 813.98,1172.24 813.98,1227.36 796.26,1227.36 787.4,1236.22 787.4,1249.02 784.45,1251.97
GND on Top Layer "GND-LCD" (solid, pour order 6): 143,1206 143,1188.65 175,1188.65 175,1252 175,1259 175,1442 175,1475 123.57,1475 123.57,1468 143,1468 143,1450 123.57,1450 123.57,1442 148,1442 148,1401 141,1401 141,1394 148,1394 148,1354 141,1354 141,1347 148,1347 148,1306 141,1306 141,1300 148,1300 148,1259 141,1259 141,1252 148,1252 148,1212 143,1212
USBSHIELD on Top Layer "Direct-Connect" (solid, pour order 3): 179.17,2395.3 179.17,2390.36 179.17,2080.21 28.72,2080.21 28.6,2395.3
NetFL23_2 on Top Layer "Std" (solid, pour order 2): 22.63,1063.87 22.63,382.76 338.57,382.76 338.57,498 266.11,498 266.11,918 338.57,918 338.57,1063.87
GND on Bottom Layer "Direct-Connect" (solid, pour order 78): 453,852.02 511.02,852.02 523,864 523,877 512,888 471.99,888 454,870.02
GND on Bottom Layer "Direct-Connect" (solid, pour order 74): 716,803.02 725,812.02 725,843.02 725,851.02 689,887.02 683,887.02 674,878.02 674,848.02 694,828.02 696,826.02 696,803.02
5V on Bottom Layer "Direct-Connect" (solid, pour order 72): 661,707.02 686,732.02 686,781.02 686,811.02 677,820.02 651,820.02 648,817.02 643,812.02 643,720.02 643,716.02 652,707.02
NetC56_1 on Bottom Layer "Direct-Connect" (solid, pour order 64): 1127.1,2455.74 1136,2464.64 1136,2467.02 1136,2551.02 1110,2577.02 1104,2577.02 1094,2567.02 1094,2533.02 1094,2469.02 1107,2456.02 1107.28,2455.74 1120,2455.74
5V on Bottom Layer "Direct-Connect" (solid, pour order 62): 767.11,2566 767.11,2629.13 777,2639.02 828,2639.02 837,2630.02 837,2569.11 838.89,2567.22 824.46,2567.22 805.69,2586 787.11,2586 767.11,2566
GND on Bottom Layer "Direct-Connect" (solid, pour order 60): 881.5,2587.06 924.8,2630.37 924.8,2648.21 920,2653.02 869,2653.02 853,2637.02 853,2592.02 858,2587.02
GND on Bottom Layer "Direct-Connect" (solid, pour order 58): 1068,2651.02 1054.72,2637.74 1054.72,2630.37 1054.72,2587.06 1054.77,2587.02 1068,2587.02 1082,2601.02 1082,2645.02
GND on Bottom Layer "Direct-Connect" (solid, pour order 56): 1056,2448.02 1070.11,2462.13 1070.11,2474.76 1070.11,2495.91 1063,2503.02 1053,2503.02 1047,2497.02 1045,2495.02 1045,2454.02
GND on Bottom Layer "Direct-Connect" (solid, pour order 54): 938,2378.02 947,2387.02 947,2431.02 947,2449.02 931,2465.02 925,2465.02 922,2462.02 922,2387.11 930.11,2379
VMCU on Bottom Layer "Direct-Connect" (solid, pour order 52): 842,2496.02 842,2438.57 869.68,2410.88 874.57,2406 907.46,2406 914,2412.54 914,2429.02 942.13,2457.14 1006.13,2457.14 1081,2532.02 1081,2575.02 1042,2614.02 1038,2618.02 1038,2637.02 1038,2644.02 1053,2659.02 1058,2664.02 1083.93,2664.02 1083.93,2665.95 1092,2674.02 1092,2696.75 1087,2701.75 1084.99,2703.76 1075.11,2703.76 1067.74,2703.76 1058,2694.02 1019,2694.02 960,2635.02 960,2620.02 960,2614.02 868.9,2522.91
GND on Bottom Layer "Direct-Connect" (solid, pour order 48): 658.46,1088.58 658.46,1062.99 673.23,1048.23 678.15,1043.31 704.72,1043.31 704.72,1046.26 728.35,1069.88 726.91,1069.88 694.43,1102.36 662.4,1102.36 658.46,1098.43
GND on Bottom Layer "Direct-Connect" (solid, pour order 44): 608.67,1453.17 608.67,1269 685.74,1191.93 705.71,1191.93 814.96,1301.18 814.96,1476.38 796.26,1495.08 650.58,1495.08
GND on Bottom Layer "Direct-Connect" (solid, pour order 42): 981.3,1437.99 1020.67,1437.99 1023.62,1440.94 1023.62,1458.66 1014.76,1467.52 985.9,1467.52 980.71,1462.33
VDDPLL on Bottom Layer "Direct-Connect" (solid, pour order 40): 627.95,1208.66 627.95,1187.01 632.87,1182.09 643.7,1182.09 659.45,1166.34 660.43,1165.35 660.43,1148.62 677.17,1148.62 684.06,1155.51 684.06,1180.12 673.23,1190.94 665.35,1190.94 655.51,1200.79
VDDMIPI on Bottom Layer "Direct-Connect" (solid, pour order 38): 582.68,1401.57 604.33,1401.57 609.25,1396.65 609.25,1330.71 617.13,1322.83 617.13,1203.12 601.38,1187.37 568.53,1187.37 566.93,1188.98 572.83,1194.88 573.82,1194.88 595.47,1216.54 595.47,1232.28 595.47,1315.94 579.72,1331.69 578.74,1332.68 578.74,1343.5 578.74,1397.64 582.68,1401.57
VDDPLL on Bottom Layer "Direct-Connect" (solid, pour order 36): 656.65,1186.02 657.48,1186.86 657.48,1221.46 657.48,1238.19 660.43,1241.14 660.43,1278.54 657.48,1281.5 637.8,1281.5 631.89,1275.59 627.95,1271.65 627.95,1221.46 627.95,1204.72 646.65,1186.02
GND on Bottom Layer "Direct-Connect" (solid, pour order 34): 676.18,1574.8 691.98,1559 698.67,1559 708.61,1559 713.58,1563.98 713.58,1608.27 709.65,1612.2 693.9,1612.2 676.18,1594.49
VDDIO2 on Bottom Layer "Direct-Connect" (solid, pour order 32): 687.01,1521.65 687.01,1467.52 690.94,1463.58 698.82,1455.71 698.82,1441.93 698.82,1428.15 703.74,1423.23 719.49,1423.23 721.46,1425.2 721.46,1453.74 721.46,1456.69 717.52,1460.63 717.52,1517.01 712.87,1521.65
VDDC1 on Bottom Layer "Direct-Connect" (solid, pour order 30): 589.57,1501.97 589.57,1510.83 602.36,1523.62 609.25,1523.62 617.13,1515.75 625.98,1515.75 634.03,1515.75 643.7,1506.08 647.81,1501.97 656.5,1501.97 670.22,1501.97 673.78,1498.41 677.17,1495.02 677.17,1482.28 667.32,1472.44 610.24,1472.44 602.36,1480.32 602.36,1489.17
VDDIO1 on Bottom Layer "Direct-Connect" (solid, pour order 28): 726.78,1502.55 734.25,1495.08 796.26,1495.08 808.07,1506.89 808.07,1525.59 800.2,1533.46 780.51,1533.46 729.24,1533.46 726.78,1531
VDDC1 on Bottom Layer "Direct-Connect" (solid, pour order 26): 823.82,1527.56 823.82,1504.92 828.74,1500 868.11,1500 875.98,1507.87 885.83,1517.72 896.65,1517.72 905.51,1526.57 940.94,1562.01 924.21,1562.01 896.65,1534.45 830.71,1534.45
AVDD12 on Bottom Layer "Direct-Connect" (solid, pour order 24): 831.53,1421.26 849.41,1421.26 903.54,1475.39 903.54,1504.92 886.81,1504.92 870.08,1488.19 837.6,1488.19 831.53,1482.12
VDDC1 on Bottom Layer "Direct-Connect" (solid, pour order 22): 953.69,1192.91 953.69,1247 968.5,1261.81 1183.07,1476.38 1188.98,1476.38 1188.98,1422.24 1180.12,1413.39 959.65,1192.91 953.74,1192.91
AVDD12 on Bottom Layer "Direct-Connect" (solid, pour order 20): 857.28,1238.19 857.28,1253.47 863.65,1259.84 865.62,1261.81 920.28,1261.81 942.91,1284.45 942.91,1361.22 942.91,1380.91 967.52,1405.51 978.35,1416.34 1082.68,1416.34 1087.6,1411.42 1087.6,1403.54 1075.79,1391.73 922.24,1238.19 861.22,1238.19
VDDC1 on Bottom Layer "Direct-Connect" (solid, pour order 18): 762.8,1217.52 762.8,1207.68 766.73,1203.74 767.72,1202.76 785.43,1202.76 792.8,1195.39 792.8,1190.94 792.8,1176.69 805.12,1164.37 821.85,1164.37 821.85,1171.26 811.02,1182.09 809.06,1184.06 809.06,1209.65 809.06,1221.46 803.15,1227.36 800.2,1230.32 796.26,1230.32 783.46,1243.11 783.46,1264.76 765.75,1264.76 762.8,1261.81
AVDD33 on Bottom Layer "Direct-Connect" (solid, pour order 16): 823.82,1351.38 839.57,1335.63 848.43,1326.77 909.45,1326.77 918.31,1326.77 933.07,1312.01 933.07,1389.76 888.68,1434.16 881.01,1434.16 863.19,1416.34 857.28,1410.43 839.57,1410.43 823.82,1394.69
AVDD33 on Bottom Layer "Direct-Connect" (solid, pour order 14): 821.08,1252 838.61,1252 856.61,1270 889.76,1270 909.76,1270 932.09,1292.32 933.07,1293.31 933.07,1326.77 928.15,1331.69 899.61,1331.69 899.61,1296.26 890.75,1287.4 842.07,1287.4 821.08,1266.42
GND on Bottom Layer "Direct-Connect" (solid, pour order 8): 821,1183 816.67,1187.33 816.67,1210.21 816.67,1219.23 821.85,1224.41 901.69,1224.41 902.67,1223.43 924.21,1223.43 930.12,1223.43 935.04,1218.5 935.04,1194.88 923.23,1183.07
GND on Bottom Layer "Direct-Connect" (solid, pour order 5): 679.65,1542 889.67,1542 910.67,1563 910.67,1599 895.67,1614 726.67,1614 679.65,1566.98
no net on Top Overlay "Logo" (solid): 1805.89,2496.84 cw(c1805.89,2444.57) 1842.86,2481.53 cw(c1809.16,2447.83) 1856.82,2447.83 cw(c1803.44,2447.83) 1841.19,2410.09 1839.79,2408.69 cw(c1807.86,2440.61) 1807.86,2395.47 cw(c1807.86,2450.12) 1769.22,2411.47 cw(c1801.86,2444.11) 1755.7,2444.11 1759.63,2440.19 cw(c1757.23,2437.79) 1760.62,2437.79 ccw(c1774.88,2437.79) 1764.79,2427.71 1768.35,2424.15 ccw(c1801.96,2457.75) 1801.96,2410.23 ccw(c1801.96,2450.63) 1830.52,2422.06 ccw(c1802.04,2450.55) 1842.32,2450.55 ccw(c1797.67,2450.55) 1829.24,2482.12
GND on GND (split plane): 1888.97,2853.64 1895.46,2852.54 1901.79,2850.71 1907.88,2848.19 1913.64,2845.01 1919.01,2841.2 1923.92,2836.81 1928.31,2831.9 1932.12,2826.52 1935.31,2820.76 1937.83,2814.68 1939.65,2808.35 1940.76,2801.85 1941.09,2795.85 1941.04,2795.28 1941.04,78.74 1941.09,78.16 1940.76,72.16 1939.65,65.67 1937.83,59.34 1935.31,53.26 1932.12,47.49 1928.31,42.12 1923.92,37.21 1919.01,32.82 1913.64,29.01 1907.88,25.82 1901.79,23.3 1895.46,21.48 1888.97,20.38 1882.97,20.04 1882.39,20.1 20.1,20.1 20.1,2853.92 1882.39,2853.92 1882.97,2853.98
GND on Supply (split plane): 1888.97,2853.64 1895.46,2852.54 1901.79,2850.71 1907.88,2848.19 1913.64,2845.01 1919.01,2841.2 1923.92,2836.81 1928.31,2831.9 1932.12,2826.52 1935.31,2820.76 1937.83,2814.68 1939.65,2808.35 1940.76,2801.85 1941.09,2795.85 1941.04,2795.28 1941.04,78.74 1941.09,78.16 1940.76,72.16 1939.65,65.67 1937.83,59.34 1935.31,53.26 1932.12,47.49 1928.31,42.12 1923.92,37.21 1919.01,32.82 1913.64,29.01 1907.88,25.82 1901.79,23.3 1895.46,21.48 1888.97,20.38 1882.97,20.04 1882.39,20.1 20.1,20.1 20.1,2853.92 1882.39,2853.92 1882.97,2853.98

## Keep-outs
GND:
  region: 744.01,715.11 713.01,715.11 713.01,685.11 744.01,685.11
  region: 744.01,675.74 713.01,675.74 713.01,645.74 744.01,645.74
  region: 744.01,636.37 713.01,636.37 713.01,606.37 744.01,606.37
  region: 744.01,597 713.01,597 713.01,567 744.01,567
  region: 557,715.11 526,715.11 526,685.11 557,685.11
  region: 557,675.74 526,675.74 526,645.74 557,645.74
  region: 557,636.37 526,636.37 526,606.37 557,606.37
  region: 557,597 526,597 526,567 557,567
  rectangle: 116,1407 131,1436
  rectangle: 116,1359.76 131,1388.76
  rectangle: 116,1312.51 131,1341.51
  rectangle: 116,1265.27 131,1294.27
  rectangle: 116,1218.02 131,1247.02
  region: 378,543 293,543 293,519 378,519
  region: 378,602 293,602 293,562 378,562
  region: 378,661.06 293,661.06 293,621.06 378,621.06
  region: 378,720.11 293,720.11 293,680.11 378,680.11
  rectangle: 290.5,739.52 375.5,760

## Silkscreen, mask and mechanical layers (free items; w line width, h text height)
Top Overlay:
  circle w5: c1800.32,2452.07 r42
  circle w5: c1805.89,2446.65 r50.92
  lines w8: 1748.15,1683.82 1726.15,1687.82 1726.15,1707.82 1749.15,1711.82 ; 1749.15,1682.82 ccw(c1808.76,1698.54) 1757.15,1664.82 ; 1749.15,1712.82 cw(c1807.68,1697.59) 1757.15,1730.82 1744.15,1749.82 1758.15,1763.82 1777.15,1750.82 ; 1756.15,1663.82 1744.15,1645.82 1758.15,1631.82 1776.15,1643.82 1783.15,1639.82 1798.15,1673.82 cw(c1810.15,1698.32) 1822.15,1673.82 1836.15,1639.82 1844.15,1643.82 1862.15,1631.82 1876.15,1645.82 1863.15,1663.82 ; 1778.15,1750.82 cw(c1809.37,1699.15) 1795.15,1757.82 1800.15,1781.82 1819.15,1781.82 1824.15,1757.82 ; 1824.15,1758.82 cw(c1807.59,1697.31) 1842.15,1750.82 1862.15,1763.82 1876.15,1749.82 1862.15,1730.82 ; 1863.15,1664.82 ccw(c1809.61,1697.84) 1871.15,1684.82 ; 1863.15,1730.82 cw(c1816,1696) 1872.15,1712.82 ; 1871.15,1683.82 1893.15,1687.82 1893.15,1707.82 1871.15,1711.82
  text "UltiMachine" at 1367,2748 h40
  text "Drude" at 1393,2614 h160
  text "0.1a" at 1694,2553 h32
  text "U" at 1776.37,2423.03 h90
Bottom Overlay:
  lines w8: 1961.13,2091 1092.13,2091 1092.13,2757 1961.13,2757
  text "RST" at 1234,1990 h32 r270
Mechanical 1:
  the board outline again, w0.5
Mechanical 8:
  drawing of 191 lines, arcs and shapes, not listed

## Text inside footprints (layer, text, board x,y; h text height)
J7: Top Overlay "1" at 1604.71,206.57 h50 r135; Top Overlay "2" at 1548.14,121.72 h50 r135; Top Overlay "4" at 1364.29,305.57 h50 r135; Top Overlay "3" at 1435.01,376.28 h50 r135